# EAGLE board bigger_board (EAGLE 6.5.0)
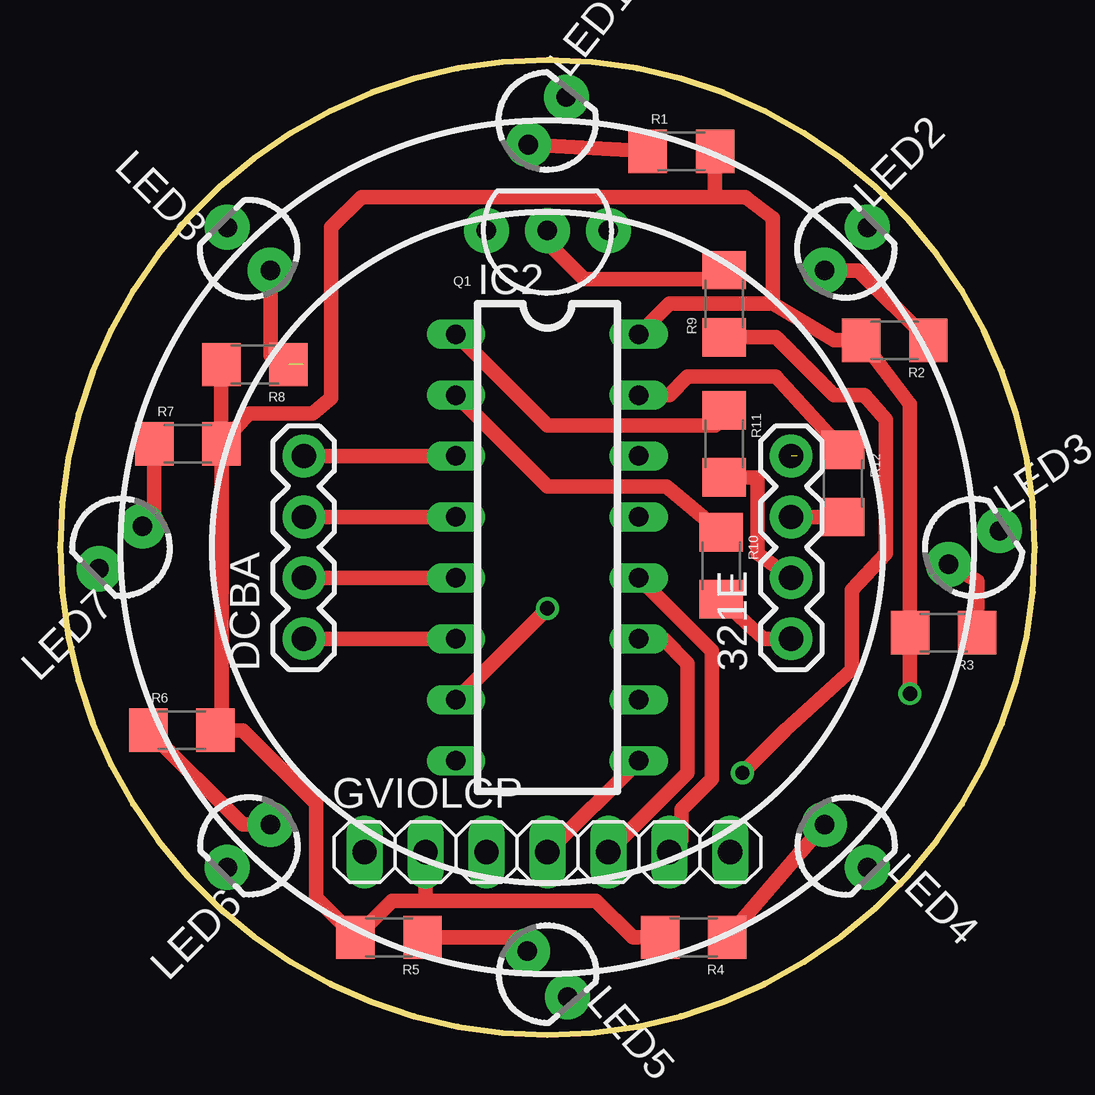
[diagram p0: board, top side]
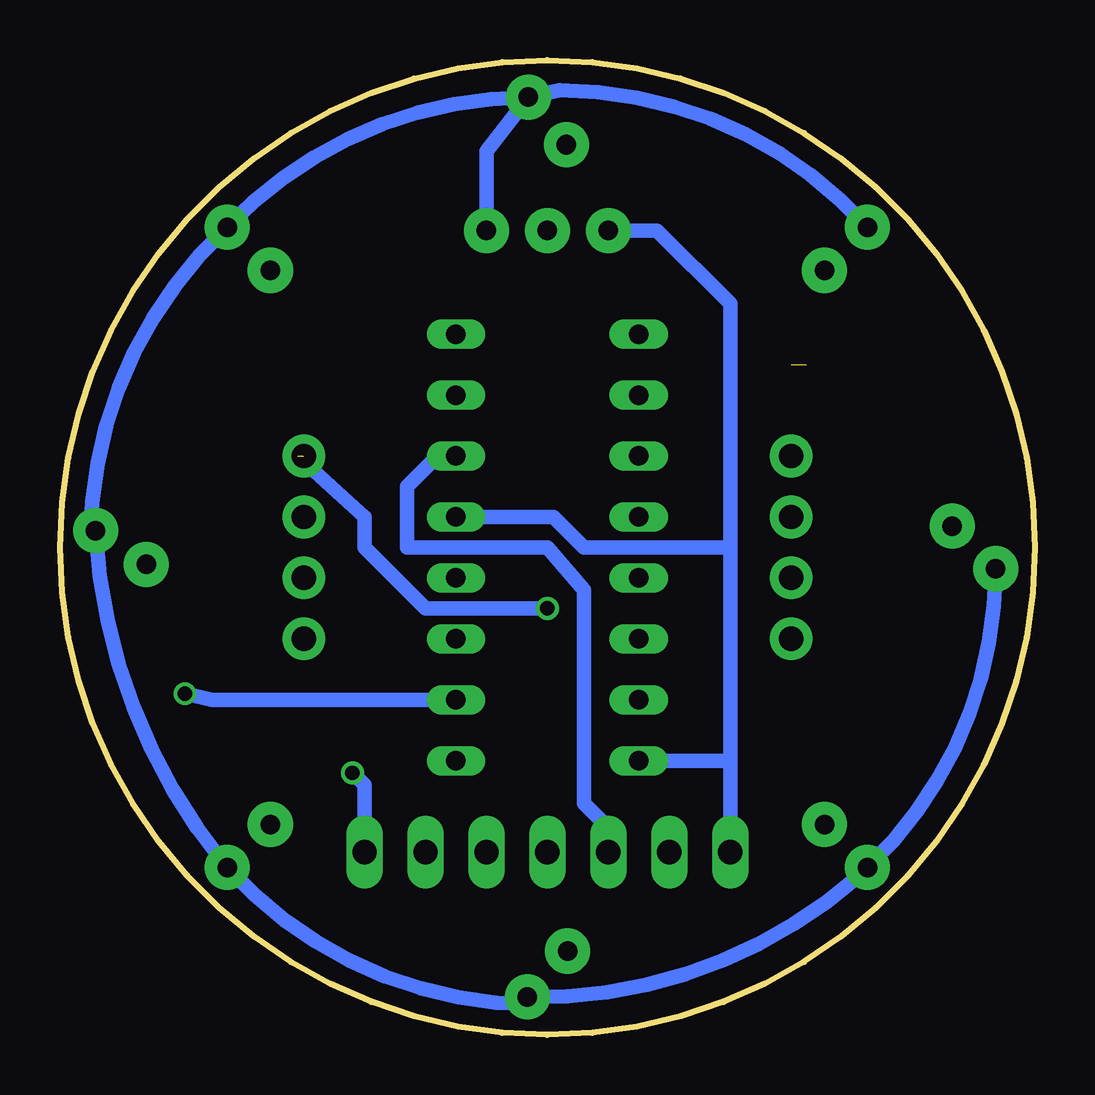
[diagram p1: board, bottom side, seen from below]

Size 40.64 x 40.64 mm. Coordinates in mm from the lower left corner, seen from the top.
Outline: 0,20.32 arc90 20.32,0 arc90 40.64,20.32 arc90 20.32,40.64 arc90 0,20.32
Copper layers (1*16): Top 0.0356mm / dielectric 1.5011mm / Bottom 0.0356mm
Design rules "LaenPCBOrder": minimum track width 6mil, minimum drill 13mil, track to track 6mil, track to pad 6mil, pad to pad 6mil, via to via 6mil, smd to smd 6mil, copper to edge 15mil, drill to drill 6mil, minimum pad ring 7mil, minimum via ring 7mil, stop-mask expansion 3mil, vias tented up to drill 0mil, thermal gap 10mil

## Footprints (pad centres in the part's own frame; a part is rotated, then mirrored left to right if it is on the bottom)
1X04-BIG = drill 1.016 pad 1.778: 1 0,0; 2 2.54,0; 3 5.08,0; 4 7.62,0
1X07 = drill 1.016 long: 1 -7.62,0; 2 -5.08,0; 3 -2.54,0; 4 0,0; 5 2.54,0; 6 5.08,0; 7 7.62,0
DIL16 = drill 0.813 long: 1 -8.89,-3.81; 2 -6.35,-3.81; 3 -3.81,-3.81; 4 -1.27,-3.81; 5 1.27,-3.81; 6 3.81,-3.81; 7 6.35,-3.81; 8 8.89,-3.81; 9 8.89,3.81; 10 6.35,3.81; 11 3.81,3.81; 12 1.27,3.81; 13 -1.27,3.81; 14 -3.81,3.81; 15 -6.35,3.81; 16 -8.89,3.81
LED3MM = drill 0.813 pad 1.88: A -1.27,0; K 1.27,0
TO-92-AMMO = drill 0.813 pad 1.88: 1 -2.54,0; 2 0,0; 3 2.54,0
1206 = smd 1.6 x 1.8: 1 -1.4,0; 2 1.4,0

## Placement (x,y rotation side)
321E  [1X04-BIG]  30.48,16.51 90 top
DCBA  [1X04-BIG]  10.16,16.51 90 top
GVIOLCP  [1X07]  20.32,7.62 0 top
IC2  74LS595N  [DIL16]  20.32,20.32 270 top
LED1  [LED3MM]  20.32,38.1 51.3 top
LED2  [LED3MM]  32.77,32.77 45 top
LED3  [LED3MM]  38.1,20.32 33.7 top
LED4  [LED3MM]  32.77,7.87 315 top
LED5  [LED3MM]  20.32,2.54 311.2 top
LED6  [LED3MM]  7.87,7.87 225 top
LED7  [LED3MM]  2.54,20.32 224.4 top
LED8  [LED3MM]  7.87,32.77 135 top
Q1  [TO-92-AMMO]  20.32,33.53 180 top
R1  [1206]  25.91,36.83 0 top
R2  [1206]  34.8,28.96 180 top
R3  [1206]  36.83,16.76 180 top
R4  [1206]  26.42,4.06 180 top
R5  [1206]  13.72,4.06 180 top
R6  [1206]  5.08,12.7 0 top
R7  [1206]  5.33,24.64 0 top
R8  [1206]  8.13,27.94 180 top
R9  [1206]  27.69,30.48 90 top
R10  [1206]  27.56,19.56 270 top
R11  [1206]  27.69,24.64 270 top
R12  [1206]  32.64,22.99 270 top

## Library data of the parts
321E DCBA = adafruit
GVIOLCP = pinhead
IC2 = SparkFun-DigitalIC
LED1-LED8 = SparkFun-LED
Q1 = SparkFun-DiscreteSemi
R1-R12 = SparkFun-Resistors

## Nets
GND: GVIOLCP.1 IC2.8 IC2.13 Q1.3
N$1: IC2.15 R12.1
N$2: IC2.1 R11.1
N$3: IC2.2 R10.1
N$4: DCBA.1 IC2.6
N$5: DCBA.2 IC2.5
N$6: DCBA.3 IC2.4
N$7: DCBA.4 IC2.3
N$8: 321E.4 IC2.7
N$9: LED3.A R3.1
N$10: LED4.A R4.1
N$11: LED5.A R5.1
N$12: LED6.A R6.1
N$13: LED7.A R7.1
N$14: LED8.A R8.1
N$15: LED1.A R1.1
N$16: LED2.A R2.1
N$17: Q1.2 R9.2
N$19: GVIOLCP.7 R9.1
N$20: GVIOLCP.3 IC2.14
N$21: GVIOLCP.4 IC2.9
N$22: GVIOLCP.5 IC2.11
N$23: GVIOLCP.6 IC2.12
N$24: 321E.3 R12.2
N$25: 321E.1 R10.2
N$26: 321E.2 R11.2
N$27: LED1.K LED2.K LED3.K LED4.K LED5.K LED6.K LED7.K LED8.K Q1.1
VCC: GVIOLCP.2 IC2.10 IC2.16 R1.2 R2.2 R3.2 R4.2 R5.2 R6.2 R7.2 R8.2

## Tracks (layer width: path | path; a pad name or v marks a point on that pad's centre or on a via)
GND
  Bottom 0.254: 12.95,11.43 12.7,11.18
  Bottom 0.61: Q1.3 15.75,33.53 12.7,30.48 12.7,20.32 | 12.7,20.32 12.7,11.18 GVIOLCP.1 | IC2.13 20.07,21.59 18.8,20.32 12.7,20.32 | IC2.8 12.95,11.43
N$1
  Top 0.61: IC2.15 25.4,26.67 26.16,27.43 29.85,27.43 R12.1
N$2
  Top 0.254: 27.3,25.4 R11.1
  Top 0.61: IC2.1 20.32,25.4 27.3,25.4
N$3
  Top 0.61: IC2.2 20.32,22.86 25.28,22.86 R10.1
N$4
  Top 0.61: DCBA.1 IC2.6
N$5
  Top 0.61: DCBA.2 IC2.5
N$6
  Top 0.61: DCBA.3 IC2.4
N$7
  Top 0.61: DCBA.4 IC2.3
N$8  (via drill 0.6)  (1 unrouted)
  Top 0.61: IC2.7 v20.32,17.78
  Bottom 0.61: v20.32,17.78 25.4,17.78 27.94,20.32 27.94,21.59 30.73,24.13
N$9
  Top 0.61: LED3.A 38.23,18.92 R3.1
N$10
  Top 0.61: LED4.A R4.1
N$11
  Top 0.254: 19.43,4.06 LED5.A
  Top 0.61: R5.1 19.43,4.06
N$12
  Top 0.61: LED6.A 7.61,8.77 R6.1
N$13
  Top 0.254: 3.93,21.46 LED7.A
  Top 0.61: R7.1 3.93,21.46
N$14  (1 unrouted)
  Top 0.254: 8.77,28.31 10.16,27.94
  Top 0.61: LED8.A 8.77,28.31
N$15
  Top 0.61: LED1.A R1.1
N$16
  Top 0.61: LED2.A 33.29,31.87 R2.1
N$17
  Top 0.254: Q1.2 20.32,33.02 | 27.56,31.5 R9.2
  Top 0.61: 20.32,33.02 21.84,31.5 27.56,31.5
N$19  (via drill 0.6)
  Top 0.61: R9.1 29.85,29.08 32.26,26.67 33.53,26.67 34.42,25.65 34.42,20.07 33.02,18.54 33.02,15.24 30.23,12.7 v28.45,10.92
  Bottom 0.61: v28.45,10.92 27.94,10.41 GVIOLCP.7
N$20
  Bottom 0.254: IC2.14 24.89,24.13 | 17.78,8.64 GVIOLCP.3
  Bottom 0.61: 24.89,24.13 26.16,22.86 26.16,20.32 20.32,20.32 18.8,18.54 18.8,9.65 17.78,8.64
N$21
  Top 0.61: GVIOLCP.4 IC2.9
N$22
  Top 0.254: IC2.11 25.15,16.51
  Top 0.61: 25.15,16.51 26.16,15.49 26.16,10.92 GVIOLCP.5
N$23
  Top 0.254: 25.91,8.13 GVIOLCP.6
  Top 0.61: IC2.12 27.18,16 27.18,10.67 25.91,9.4 25.91,8.13
N$24
  Top 0.254: R12.2 32.77,21.59
  Top 0.61: 32.77,21.59 321E.3
N$25
  Top 0.61: 321E.1 29.33,16.51 R10.2
N$26
  Top 0.61: R11.2 29.08,23.24 29.08,20.07 321E.2
N$27
  Bottom 0.254: LED3.K 39.37,20.57 | LED4.K 33.78,7.11 | LED5.K 20.83,1.27 | LED6.K 7.37,6.6 7.62,6.6
  Bottom 0.61: 39.37,20.57 arc47 LED2.K arc46 LED1.K | 33.78,7.11 arc36 LED3.K | 20.83,1.27 arc48 LED4.K | 7.37,6.6 arc43 LED5.K | LED6.K arc-46 LED7.K | LED1.K 19.81,39.37 arc48 LED8.K | LED1.K 22.86,36.83 Q1.1
VCC  (via drill 0.6)
  Top 0.254: 6.73,25.39 R7.2 | 6.73,12.95 R6.2 | 6.6,28.57 R8.2
  Top 0.61: 29.72,30.48 29.72,34.04 28.57,34.93 27.31,34.93 | 29.72,30.48 25.4,30.48 IC2.16 | R1.2 27.31,34.93 | R8.2 6.73,25.39 | 6.73,12.95 R7.2 7.88,25.91 10.54,25.91 11.3,26.54 11.3,33.66 12.58,34.93 27.31,34.93 | R6.2 7.62,12.7 10.67,9.65 10.67,5.71 R5.2 13.84,5.59 15.24,5.59 | R4.2 23.88,4.06 22.35,5.59 15.24,5.59 | GVIOLCP.2 15.24,5.59 | v35.43,14.22 35.43,15.37 R3.2 35.43,26.29 R2.2 32.26,28.96 29.72,30.48
  Bottom 0.61: IC2.10 34.29,13.97 v35.43,14.22